# Altium PCB twoboards.PcbDoc
Units mil, origin at the board's own origin, x right, y up, seen from the top; angles counter-clockwise.
Board outline 2204.72 x 1023.62 mil, 2 copper layers (Top Layer, Bottom Layer); 32 components, 27 nets, 115 pads, 18 vias.
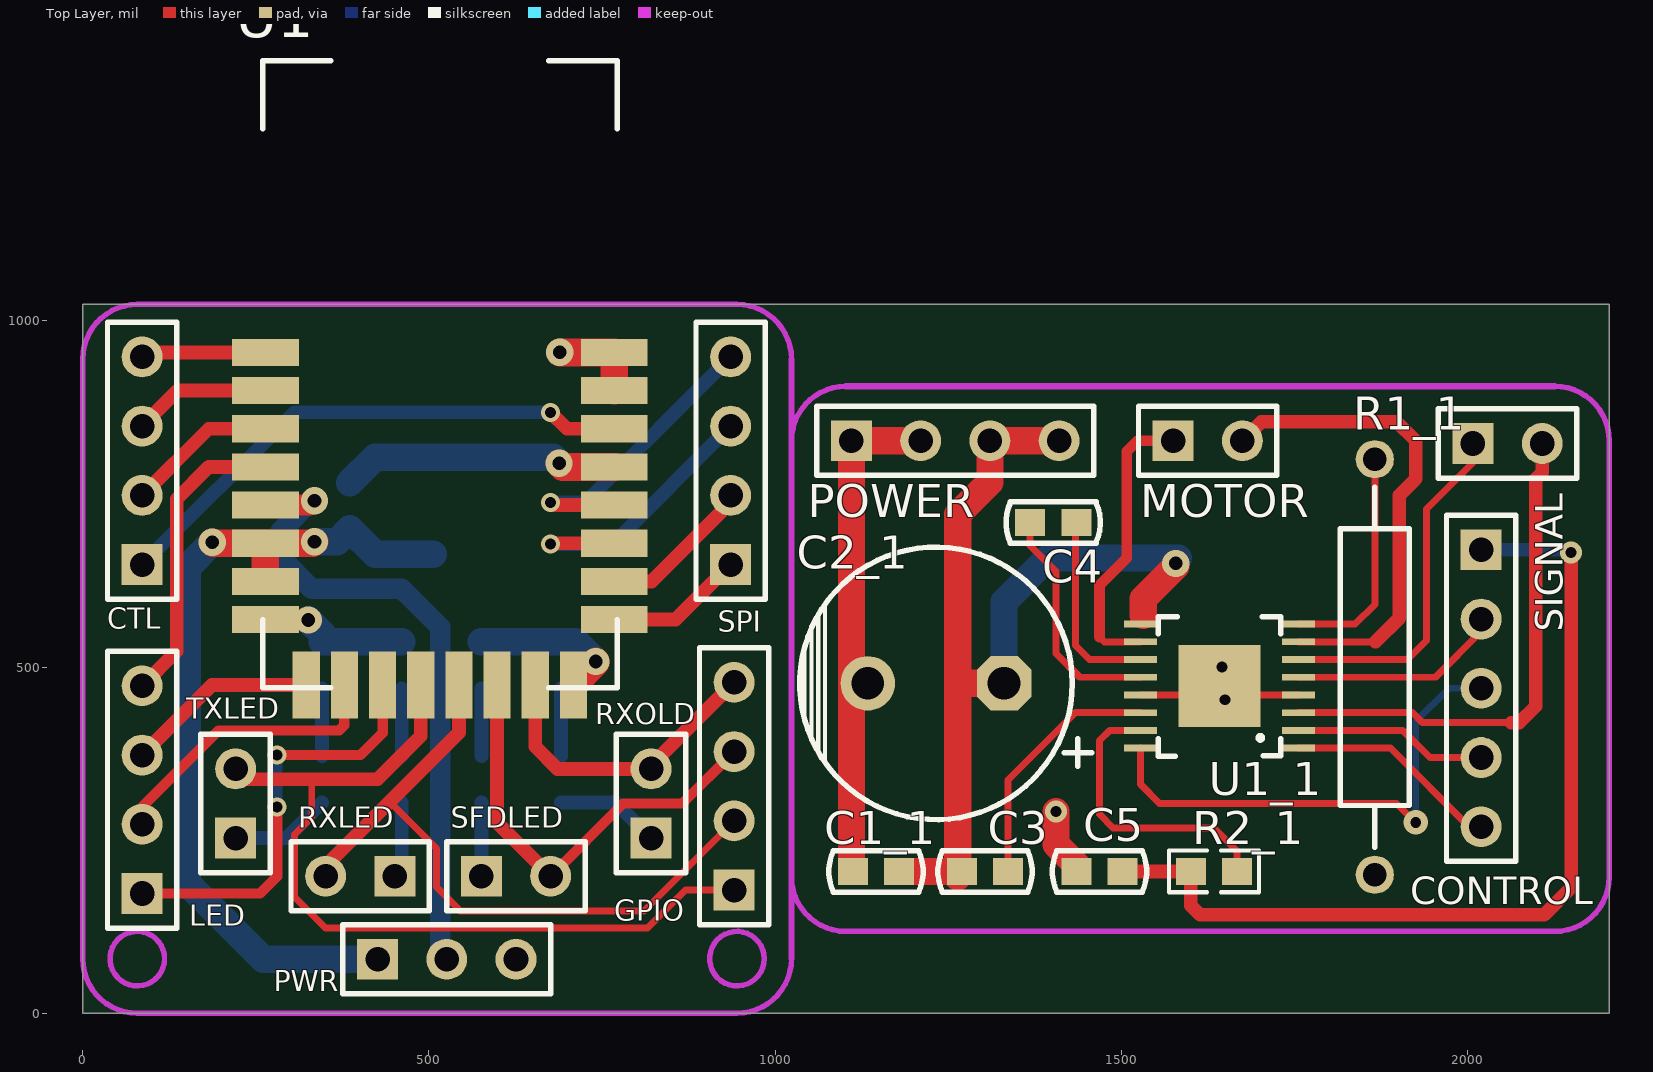
[diagram p0: Top Layer view]
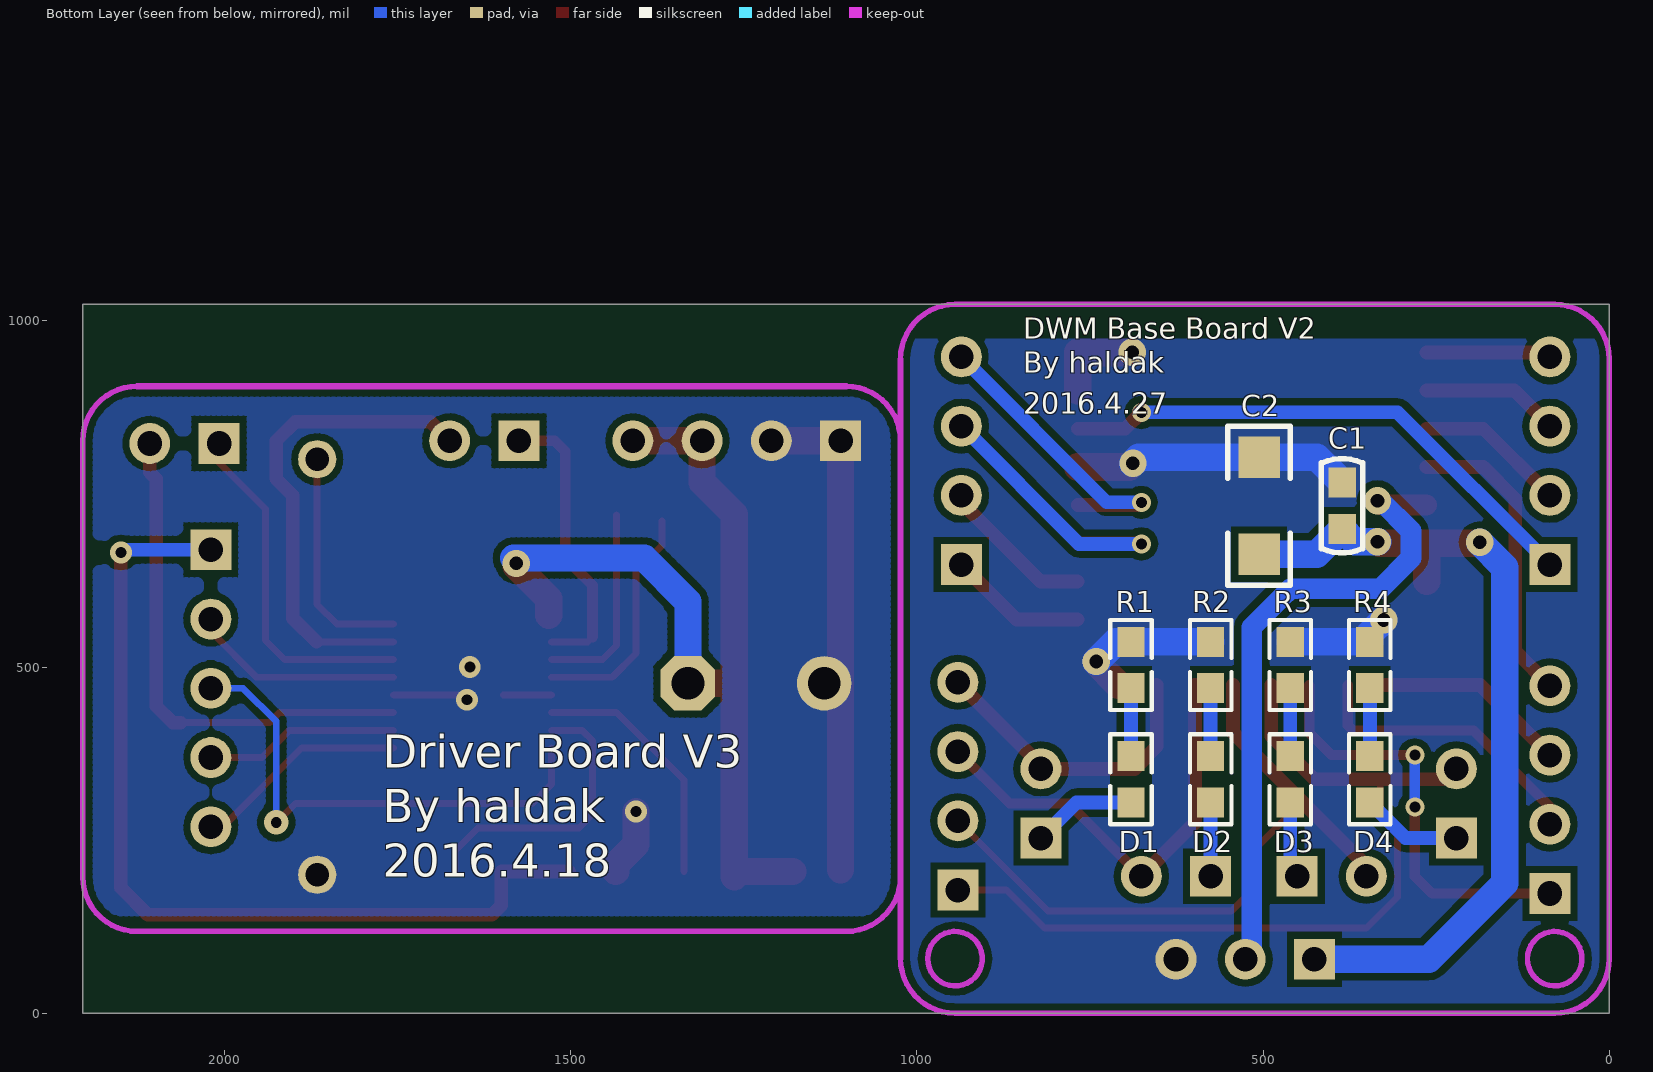
[diagram p1: Bottom Layer view, seen from below]
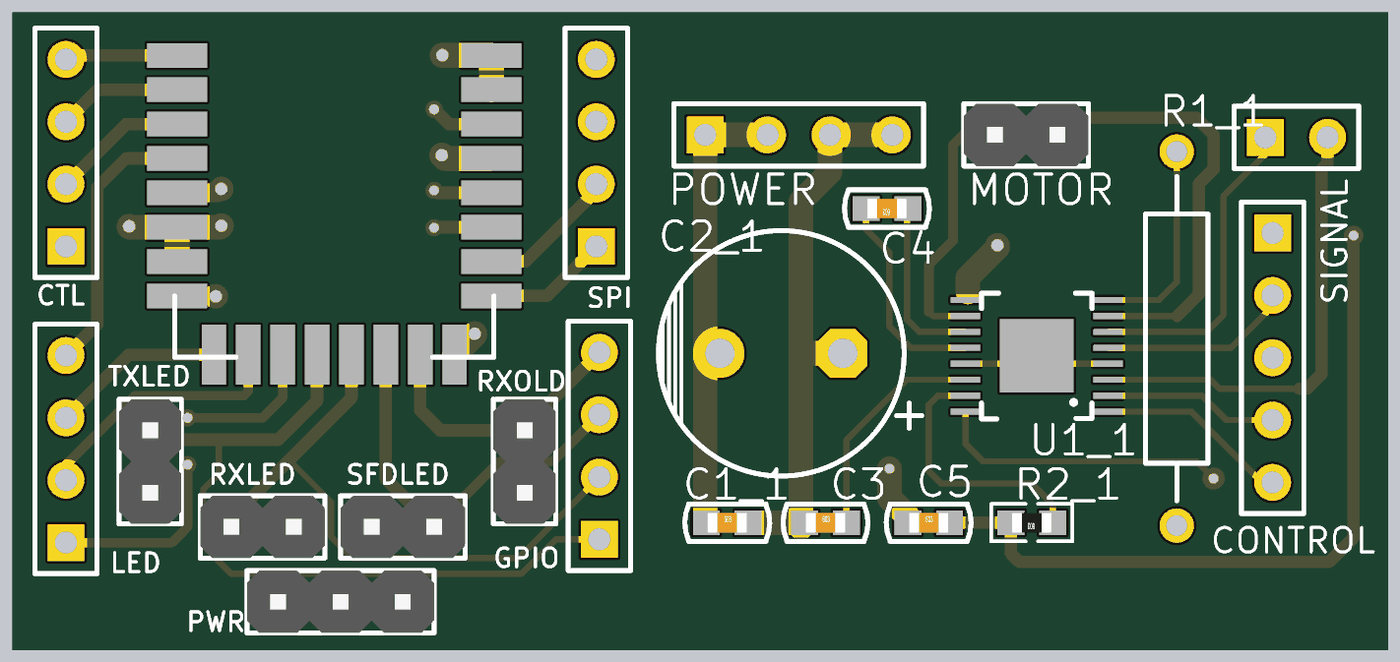
[diagram p2: 3D render of the assembled board from above, using the file's embedded part models]
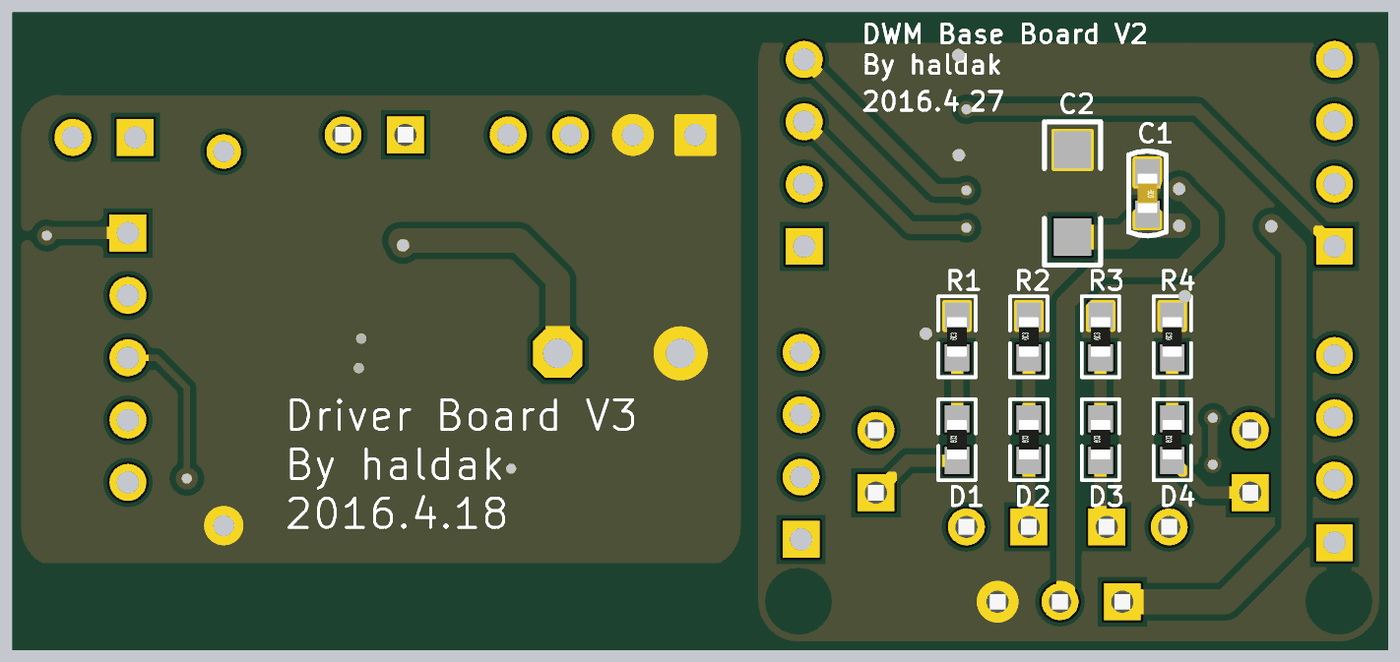
[diagram p3: 3D render of the assembled board from below, using the file's embedded part models]

## Layer stack, top to bottom
Top Solder: solder mask 0.4, Solder Resist, Dk 3.5
Top Layer: signal copper 1.4
Dielectric 1: dielectric 12.6, FR-4, Dk 4.8
Bottom Layer: signal copper 1.4
Bottom Solder: solder mask 0.4, Solder Resist, Dk 3.5

## Board outline
0,0 2204.72,0 2204.72,1023.62 0,1023.62

## Design rules (kind name [scope] priority, off if disabled: settings)
Clearance [All] p1: gap=10
PolygonConnect [All] p1: connectstyle=Direct reliefconductorwidth=10 reliefentries=4 polygonreliefangle="90 Angle" airgapwidth=10
RoutingVias [All] p1: holewidth=28 width=50 viastyle="Through Hole" minholewidth=28 minwidth=50 maxholewidth=28 maxwidth=50
SolderMaskExpansion [All] p1: expansion=4
Width [All] p1: maxlimit=50 minlimit=10 preferedwidth=10 minimp=50.000000 maximp=50.000000 favimp=50.000000
30 further rules are at their usual default settings.

## Classes and differential pairs
component class DWM1000_Basic_Board: C1 C2 CTL D1 D2 D3 D4 GPIO LED PWR R1 R2 R3 R4 RXLED RXOLD SFDLED SPI TXLED U1

## Components (designator, comment, footprint, x,y, rotation, side; value= is the part's Value field where it differs from the comment)
C1 "Cap-S" C-0603 385.75,732.88 r270 bottom
C1_1 "Cap-S" C-0603 1145.67,204.72 r0 top (schematic designator C1)
C2 "Cap-Pol" 1206 505.75,732.88 r90 bottom
C2_1 "Cap-Pol-ER" C-RB-5.0/10 1232.28,476.38 r180 top (schematic designator C2)
C3 "Cap-S" C-0603 1303.15,204.72 r0 top
C4 "Cap-S" C-0603 1401.57,708.66 r180 top
C5 "Cap-S" C-0603 1468.5,204.72 r0 top
CONTROL "Header 5" HDR1X5 2019.69,669.29 r270 top
CTL "Header 4" HDR4X1-2.54 85.75,647.88 r90 top
D1 "LED0" 0603-1 690.75,337.88 r90 bottom
D2 "LED0" 0603-1 575.75,337.88 r90 bottom
D3 "LED0" 0603-1 460.75,337.88 r90 bottom
D4 "LED0" 0603-1 345.75,337.88 r90 bottom
GPIO "Header 4" HDR4X1-2.54 940.75,177.88 r90 top
LED "Header 4" HDR4X1-2.54 85.75,172.88 r90 top
MOTOR "Header 2" HDR2X1-2.54 1574.8,826.77 r0 top
POWER "Header 4" HDR1X4 1110.24,826.77 r0 top
PWR "Header 3" HDR3X1-2.54 425.75,77.88 r0 top
R1 "Res1" 0603-1 690.75,502.88 r90 bottom
R1_1 "Res Adj2" AXIAL-0.6 1866.14,500 r90 top (schematic designator R1)
R2 "Res1" 0603-1 575.75,502.88 r90 bottom
R2_1 "Res1" 0603-1 1633.86,204.72 r180 top (schematic designator R2)
R3 "Res1" 0603-1 460.75,502.88 r90 bottom
R4 "Res1" 0603-1 345.75,502.88 r90 bottom
RXLED "Header 2" HDR2X1-2.54 450.75,197.88 r180 top
RXOLD "Header 2" HDR2X1-2.54 820.75,252.88 r90 top (schematic designator RXOLED)
SFDLED "Header 2" HDR2X1-2.54 575.75,197.88 r0 top
SIGNAL "Header 2" HDR1X2 2007.87,822.83 r0 top
SPI "Header 4" HDR4X1-2.54 935.75,647.88 r90 top
TXLED "Header 2" HDR2X1-2.54 220.75,252.88 r90 top
U1 "DWM1000" DWM1000 515.75,922.88 r0 top
U1_1 "DRV8801" HTSSOP16 1641.73,472.44 r180 top (schematic designator U1)

## Footprints (in the part's own frame and the unit in brackets; to place one, negate y for a bottom-side part, rotate by r counter-clockwise, add the part's x,y. Pads: shape width x height; smd on the part's side, far side on the other; paste and mask are expansions set on the pad)
0603-1 [mm] "0603带丝印"
  rect 1.1x1 smd: 1(-0.85,0) 2(0.85,0)
  silkscreen extent -1.65,-0.76 1.65,0.76, body extent -0.8,-0.4 0.8,0.4, height 0.3
1206 [mil] "贴片元件"
  rect 60x60 smd: 1(-70,0) 2(70,0)
  silkscreen extent -115,-45 115,45, body extent -75,-35 75,35, height 39
AXIAL-0.6 [mm] "Axial Device, Thru-Hole; 2 Leads; 0.6 in Pin Spacing"
  round 1.4 hole 0.85: 1(-7.62,0) 2(7.62,0)
  silkscreen extent -6.6,-1.27 6.6,1.27
C-0603 [mm] "贴片电容"
  rect 1.1x1 smd: 1(-0.85,0) 2(0.85,0)
  silkscreen extent -1.73,-0.76 1.73,0.76, body extent -0.8,-0.4 0.8,0.4, height 0.3
C-RB-5.0/10 [mm] "插件电解电容"
  oct 2x2 hole 1.2: 1(-2.5,0)
  round 2 hole 1.2: 2(2.5,0)
  silkscreen extent -5.71,-5 5,5
DWM1000 [mm] "Decawave Inc."
  rect 2.45x1 smd paste+0 mask+0.1: 1(-6.4,0.8) 2(-6.4,-0.6) 3(-6.4,-2) 4(-6.4,-3.4) 5(-6.4,-4.8) 6(-6.4,-6.2) 7(-6.4,-7.6) 8(-6.4,-9) 17(6.4,-9) 18(6.4,-7.6) 19(6.4,-6.2) 20(6.4,-4.8) 21(6.4,-3.4) 22(6.4,-2) 23(6.4,-0.6) 24(6.4,0.8)
  rect 1x2.45 smd paste+0 mask+0.1: 9(-4.9,-11.4) 10(-3.5,-11.4) 11(-2.1,-11.4) 12(-0.7,-11.4) 13(0.7,-11.4) 14(2.1,-11.4) 15(3.5,-11.4) 16(4.9,-11.4)
  silkscreen extent -6.5,-11.5 6.5,11.5
HDR1X2 [mm] "Connector; Header; 2 Position"
  rect 1.5x1.5 hole 0.9: 1(0,0)
  round 1.5 hole 0.9: 2(2.54,0)
  silkscreen extent -1.27,-1.27 3.81,1.27
HDR1X4 [mm] "Connector; Header; 4 Position"
  rect 1.5x1.5 hole 0.9: 1(0,0)
  round 1.5 hole 0.9: 2(2.54,0) 3(5.08,0) 4(7.62,0)
  silkscreen extent -1.27,-1.27 8.89,1.27
HDR1X5 [mm] "Connector; Header; 5 Position"
  rect 1.5x1.5 hole 0.9: 1(0,0)
  round 1.5 hole 0.9: 2(2.54,0) 3(5.08,0) 4(7.62,0) 5(10.16,0)
  silkscreen extent -1.27,-1.27 11.43,1.27
HDR2X1-2.54 [mm] "2.54单排针排座"
  rect 1.5x1.5 hole 0.9: 1(0,0)
  round 1.5 hole 0.9: 2(2.54,0)
  silkscreen extent -1.27,-1.27 3.81,1.27, body extent -1.27,-1.27 3.81,1.27, height 8.54
HDR3X1-2.54 [mm] "2.54单排针排座"
  rect 1.5x1.5 hole 0.9: 1(0,0)
  round 1.5 hole 0.9: 2(2.54,0) 3(5.08,0)
  silkscreen extent -1.27,-1.27 6.35,1.27, body extent -1.27,-1.27 6.35,1.27, height 8.54
HDR4X1-2.54 [mm] "2.54单排针排座"
  rect 1.5x1.5 hole 0.9: 1(0,0)
  round 1.5 hole 0.9: 2(2.54,0) 3(5.08,0) 4(7.62,0)
  silkscreen extent -1.27,-1.27 8.89,1.27
HTSSOP16 [mm]
  rect 3x3 smd paste+0 mask+0.1: 0(0,0)
  rect 1.2x0.25 smd paste+0 mask+0.1: 1(-2.9,2.275) 2(-2.9,1.625) 3(-2.9,0.975) 4(-2.9,0.325) 5(-2.9,-0.325) 6(-2.9,-0.975) 7(-2.9,-1.625) 8(-2.9,-2.275) 9(2.9,-2.275) 10(2.9,-1.625) 11(2.9,-0.975) 12(2.9,-0.325) 13(2.9,0.325) 14(2.9,0.975) 15(2.9,1.625) 16(2.9,2.275)
  silkscreen extent -2.25,-2.55 2.25,2.58

## Part data
C1 C1_1 C3 C4 C5: "贴片瓷片电容"
C2: "贴片电解电容"
C2_1: "插件电解电容"
CONTROL: "Header, 5-Pin"
CTL GPIO LED MOTOR PWR RXLED RXOLD SFDLED SPI TXLED: "接插件"
D1 D2 D3 D4: "发光二极管"
POWER: "Header, 4-Pin"
R1 R2 R2_1 R3 R4: "贴片电阻"
R1_1: "Variable Resistor"
SIGNAL: "Header, 2-Pin"

## Via types
v1: diameter 39.37, hole 19.68, Top Layer to Bottom Layer, tented both sides, 8 vias
v2: diameter 27.56, hole 15.75, Top Layer to Bottom Layer, tented both sides, 5 vias
v3: diameter 31.5, hole 15.75, Top Layer to Bottom Layer, tented both sides, 4 vias
v4: diameter 35.43, hole 15.75, Top Layer to Bottom Layer, tented both sides, 1 vias

## Nets (pads, with @x,y where several pads share a name; then routed paths per layer and width w, separated by ;. In a path a pad name is that pad's centre, name@x,y a point inside that pad or via, vN(x,y) a via of type N, cw(c..) or ccw(c..) an arc to the next point about the centre after c; other vN are vias at no path point)
CLK: SPI.4 U1.20 | length 440.6
  Top Layer w20: v2(675.75,737.88) 679.73,733.9 U1.20
  Bottom Layer w20: v2(675.75,737.88) 725.75,737.88 SPI.4
CSN: SPI.1 U1.17 | length 200.9
  Top Layer w20: U1.17 856.42,568.55 SPI.1
EXTON: CTL.4 U1.1 | length 171.5
  Top Layer w20: CTL.4@92.25,954.37 U1.1
GND: C1.1 C2.2 PWR.3 R1.2 R2.2 R3.2 R4.2 U1.8 U1.16 U1.21 U1.23 U1.24 | length 915.6
  Top Layer w40: v1(687.99,794.29) 693.27,789.02 U1.21 ; v1(688.98,954.72) 689.33,954.37 U1.24 U1.23 ; U1.16 740.75,506.14 v1(740.75,507.88)
  Bottom Layer w40: v1(325.75,567.88) 345.75,547.88 R4.2 R3.2 ; C1.1 422.29,802.88 C2.2 679.41,802.88 v1(687.99,794.29) ; R2.2 R1.2 712.28,536.34 v1(740.75,507.88)
GPIO4: LED.1 U1.11 | length 614.9
  Top Layer w15: LED.1 255.75,172.88 280.75,197.88 v2(280.75,297.88) ; v2(280.75,372.88) 400.75,372.88 433.07,405.2 U1.11
  Bottom Layer w15: v2(280.75,297.88) v2(280.75,372.88)
GPIO5: LED.2 U1.10 | length 424.4
  Top Layer w15: LED.2 85.75,297.88 196.2,408.33 370.61,408.33 377.95,415.67 U1.10
GPIO6: LED.3 U1.9 | length 279
  Top Layer w20: LED.3 186.93,474.06 U1.9
GPIO7: LED.4 U1.4 | length 437.9
  Top Layer w20: LED.4 135.75,522.88 135.75,742.88 181.89,789.02 U1.4
IRQ: CTL.1 U1.22 | length 782.9
  Top Layer w20: v2(675.75,867.88) 699.49,844.14 U1.22
  Bottom Layer w20: CTL.1 305.75,867.88 v2(675.75,867.88)
MISO: SPI.3 U1.19 | length 422.8
  Top Layer w20: v2(675.75,677.88) 676.66,678.78 U1.19
  Bottom Layer w20: v2(675.75,677.88) 765.75,677.88 SPI.3
MOSI: SPI.2 U1.18 | length 225.3
  Top Layer w20: U1.18 821.54,623.66 935.75,737.88 SPI.2
NetD1_1: D1.1 RXOLD.1 | length 151.3
  Bottom Layer w20: D1.1 769.21,304.41 RXOLD.1
NetD1_2: D1.2 R1.1 | length 98.1
  Bottom Layer w20: D1.2 R1.1
NetD2_1: D2.1 SFDLED.1 | length 106.5
  Bottom Layer w20: SFDLED.1 D2.1
NetD2_2: D2.2 R2.1 | length 98.1
  Bottom Layer w20: D2.2 R2.1
NetD3_1: D3.1 RXLED.1 | length 110.7
  Bottom Layer w20: RXLED.1 460.75,207.88 D3.1
NetD3_2: D3.2 R3.1 | length 98.1
  Bottom Layer w20: D3.2 R3.1
NetD4_1: D4.1 TXLED.1 | length 146.3
  Bottom Layer w20: TXLED.1 294.21,252.88 D4.1
NetD4_2: D4.2 R4.1 | length 98.1
  Bottom Layer w20: D4.2 R4.1
RSTN: CTL.2 U1.3 | length 217.9
  Top Layer w20: CTL.2 182.01,844.14 U1.3
RXLED: GPIO.2 RXLED.2 U1.13 | length 994.3
  Top Layer w10: 450.75,297.88 510.75,237.88 510.75,182.61 545.48,147.88 810.75,147.88 GPIO.2
  Top Layer w20: RXLED.2 350.75,212.88 543.31,405.44 U1.13
RXOKLED: GPIO.4 RXOLD.2 U1.15 | length 444.2
  Top Layer w20: U1.15 653.55,385.08 685.75,352.88 RXOLD.2 820.75,357.88 GPIO.4
SFDLED: GPIO.3 SFDLED.2 U1.14 | length 647.8
  Top Layer w15: SFDLED.2 780.75,302.88 865.75,302.88 GPIO.3
  Top Layer w20: U1.14 598.43,275.2 SFDLED.2
TXLED: GPIO.1 TXLED.2 U1.12 | length 1230
  Top Layer w10: 330.75,337.88 330.75,283.05 305.75,258.05 305.75,167.88 350.75,122.88 815.75,122.88 870.75,177.88 GPIO.1
  Top Layer w20: TXLED.2 235.75,337.88 330.75,337.88 425.75,337.88 488.19,400.32 U1.12
VCC_3V3: C1.2 C2.1 PWR.1 U1.6 U1.7 | length 1225.9
  Top Layer w40: v1(187.01,680.12) 188.34,678.78 U1.6 ; U1.7 U1.6 ; v1(334.65,681.1) 332.32,678.78 U1.6
  Bottom Layer w40: v1(187.01,680.12) 150.75,643.86 150.75,187.88 260.75,77.88 PWR.1 ; v1(334.65,681.1) 367.44,681.1 C1.2 422.29,662.88 C2.1
VDDAON: PWR.2 U1.5 | length 933.7
  Top Layer w30: U1.5 328.39,733.9 v1(334.65,740.16)
  Bottom Layer w30: v1(334.65,740.16) 330.06,740.16 286.42,696.51 286.42,657.29 330.83,612.88 460.4,612.88 465.39,607.88 465.91,607.88 516.38,557.4 516.38,87.24 PWR.2
WKP: CTL.3 U1.2 | length 199.3
  Top Layer w20: CTL.3 137.13,899.25 U1.2
pads on no net: C1_1.1 C1_1.2 C2_1.1 C2_1.2 C3.1 C3.2 C4.1 C4.2 C5.1 C5.2 CONTROL.1 CONTROL.2 CONTROL.3 CONTROL.4 CONTROL.5 MOTOR.1 MOTOR.2 POWER.1 POWER.2 POWER.3 POWER.4 R1_1.1 R1_1.2 R2_1.1 R2_1.2 SIGNAL.1 SIGNAL.2 U1_1.0 U1_1.1 U1_1.2 U1_1.3 U1_1.4 U1_1.5 U1_1.6 U1_1.7 U1_1.8 U1_1.9 U1_1.10 U1_1.11 U1_1.12 U1_1.13 U1_1.14 U1_1.15 U1_1.16
copper on no net: | length 9430.6
  Top Layer w10: 1336.61,204.72 1336.61,336.61 1434.06,434.06 1527.56,434.06 ; 1368.11,710.63 1368.11,675.2 1405.51,637.8 1405.51,519.68 1439.96,485.24 1527.56,485.24 ; 1433.7,719.84 1433.7,530.87 1453.74,510.83 1527.56,510.83 ; 1468.5,543.31 1475.39,536.42 1527.56,536.42 ; 1527.56,382.87 1527.56,330.71 1555.12,303.15 1897.64,303.15 v4(1925.2,275.59) ; 1527.56,408.46 1483.27,408.46 1468.5,393.7 1468.5,287.4 1488.19,267.72 1633.86,267.72 1667.32,234.25 1667.32,204.72 ; 1527.56,459.65 1597.44,459.65 ; v3@1654.53,459.65 1755.91,459.65 ; 1755.91,382.87 1888.78,382.87 2002.36,269.29 2019.69,269.29 ; 1755.91,408.46 1906.5,408.46 1945.67,369.29 2019.69,369.29 ; 1755.91,434.06 1920.28,434.06 1934.65,419.68 2062.99,419.68 ; 1755.91,485.24 1953.74,485.24 2019.69,551.18 2019.69,569.29 ; 1755.91,510.83 1913.39,510.83 1940.94,538.39 1940.94,728.35 2007.87,795.28 2007.87,822.83 ; 1755.91,536.42 1867.13,536.42 ; 1755.91,562.01 1837.6,562.01 1866.14,590.55 1866.14,776.38
  Top Layer w15.75: 1468.5,543.31 1468.5,618.11 1507.87,657.48 1507.87,811.02 1523.62,826.77 1574.8,826.77
  Top Layer w19.68: 1501.97,204.72 1600.39,204.72 1600.39,155.51 1613.95,141.95 2110.46,141.95 2149.61,181.1 v3(2149.61,665.35) ; 1674.8,826.77 1702.36,854.33 1897.64,854.33 1925.2,826.77 1925.2,771.65 1901.57,748.03 1901.57,570.87 1867.13,536.42 ; 2062.99,419.68 2074.8,419.68 2098.43,443.31 2098.43,771.65 2107.87,781.1 2107.87,822.83
  Top Layer w39.37: 1110.24,206.69 1110.24,826.77 1210.24,826.77 ; 1179.13,204.72 1259.84,204.72 ; 1263.78,196.85 1263.78,720.47 1310.24,766.93 1310.24,826.77 1410.24,826.77 ; 1267.72,476.38 1330.71,476.38 ; v3(1405.51,291.34) 1405.51,244.09 1435.04,214.57 1435.04,204.72 ; 1531.5,574.8 1531.5,598.43 1578.74,645.67 v1(1578.74,649.61)
  Bottom Layer w10: v4(1925.2,275.59) 1925.2,421.26 1973.23,469.29 2019.69,469.29
  Bottom Layer w19.68: 2019.69,669.29 v3@2145.67,669.29
  Bottom Layer w39.37: 1330.71,476.38 1330.71,594.49 1393.7,657.48 v1@1582.68,657.48
  other v3: 1649.61,452.76 1645.67,500

## Polygon pours and split planes (outlines as drawn)
GND on Bottom Layer "Top Layer-No Net" (solid, remove dead copper, pour order 20): 1023.62,974.41 0,974.41 0,0 1023.62,0
no net on Bottom Layer "TopLayer-GND" (hatched 90Degree grid 7.87 track 19.68, remove dead copper, pour order 1000): 1051.18,893.7 1047.24,889.76 1047.24,149.61 2177.17,149.61 2181.1,153.54 2188.98,161.42 2188.98,889.76 1055.12,889.76 1051.18,893.7

## Keep-outs
Keep-Out Layer:
  circle w7.87: c78.74,78.74 r39.37
  circle w7.87: c944.88,78.74 r39.37
  lines w7.87: 0,78.74 ccw(c78.74,78.74) 78.74,0 ; 0,944.88 cw(c78.74,944.88) 78.74,1023.62 ; 944.88,0 ccw(c944.88,78.74) 1023.62,78.74 ; 944.88,1023.62 cw(c944.88,944.88) 1023.62,944.88 ; 1023.62,196.85 ccw(c1102.36,196.85) 1102.36,118.11 ; 1023.62,826.77 cw(c1102.36,826.77) 1102.36,905.51 ; 2125.98,118.11 ccw(c2125.98,196.85) 2204.72,196.85 ; 2125.98,905.51 cw(c2125.98,826.77) 2204.72,826.77
  lines w8: 0,78.74 0,944.88 ; 78.74,0 944.88,0 ; 78.74,1023.62 944.88,1023.62 ; 1023.62,78.74 1023.62,944.88 ; 1023.62,196.85 1023.62,826.77 ; 1102.36,118.11 2125.98,118.11 ; 2204.72,196.85 2204.72,826.77
  lines w10: 1102.36,905.51 2125.98,905.51

## Silkscreen, mask and mechanical layers (free items; w line width, h text height)
Bottom Overlay:
  text "DWM Base Board V2" at 846.46,974.41 h30
  text "By haldak" at 846.46,925.2 h30
  text "2016.4.27" at 846.46,866.14 h30
  text "Driver Board V3" at 1771.65,354.33 h47.24
  text "By haldak" at 1771.65,275.59 h47.24
  text "2016.4.18" at 1771.65,196.85 h47.24
Drill Drawing:
  text ".Legend" at 866.14,1102.36 h60